# Altium PCB CC2530Controller.PcbDoc
Units mil, origin at the board's own origin, x right, y up, seen from the top; angles counter-clockwise.
Board outline 1627 x 1718 mil, 2 copper layers (Top Layer, Bottom Layer), stack 12.8 mil thick; 49 components, 32 nets, 192 pads, 185 vias.
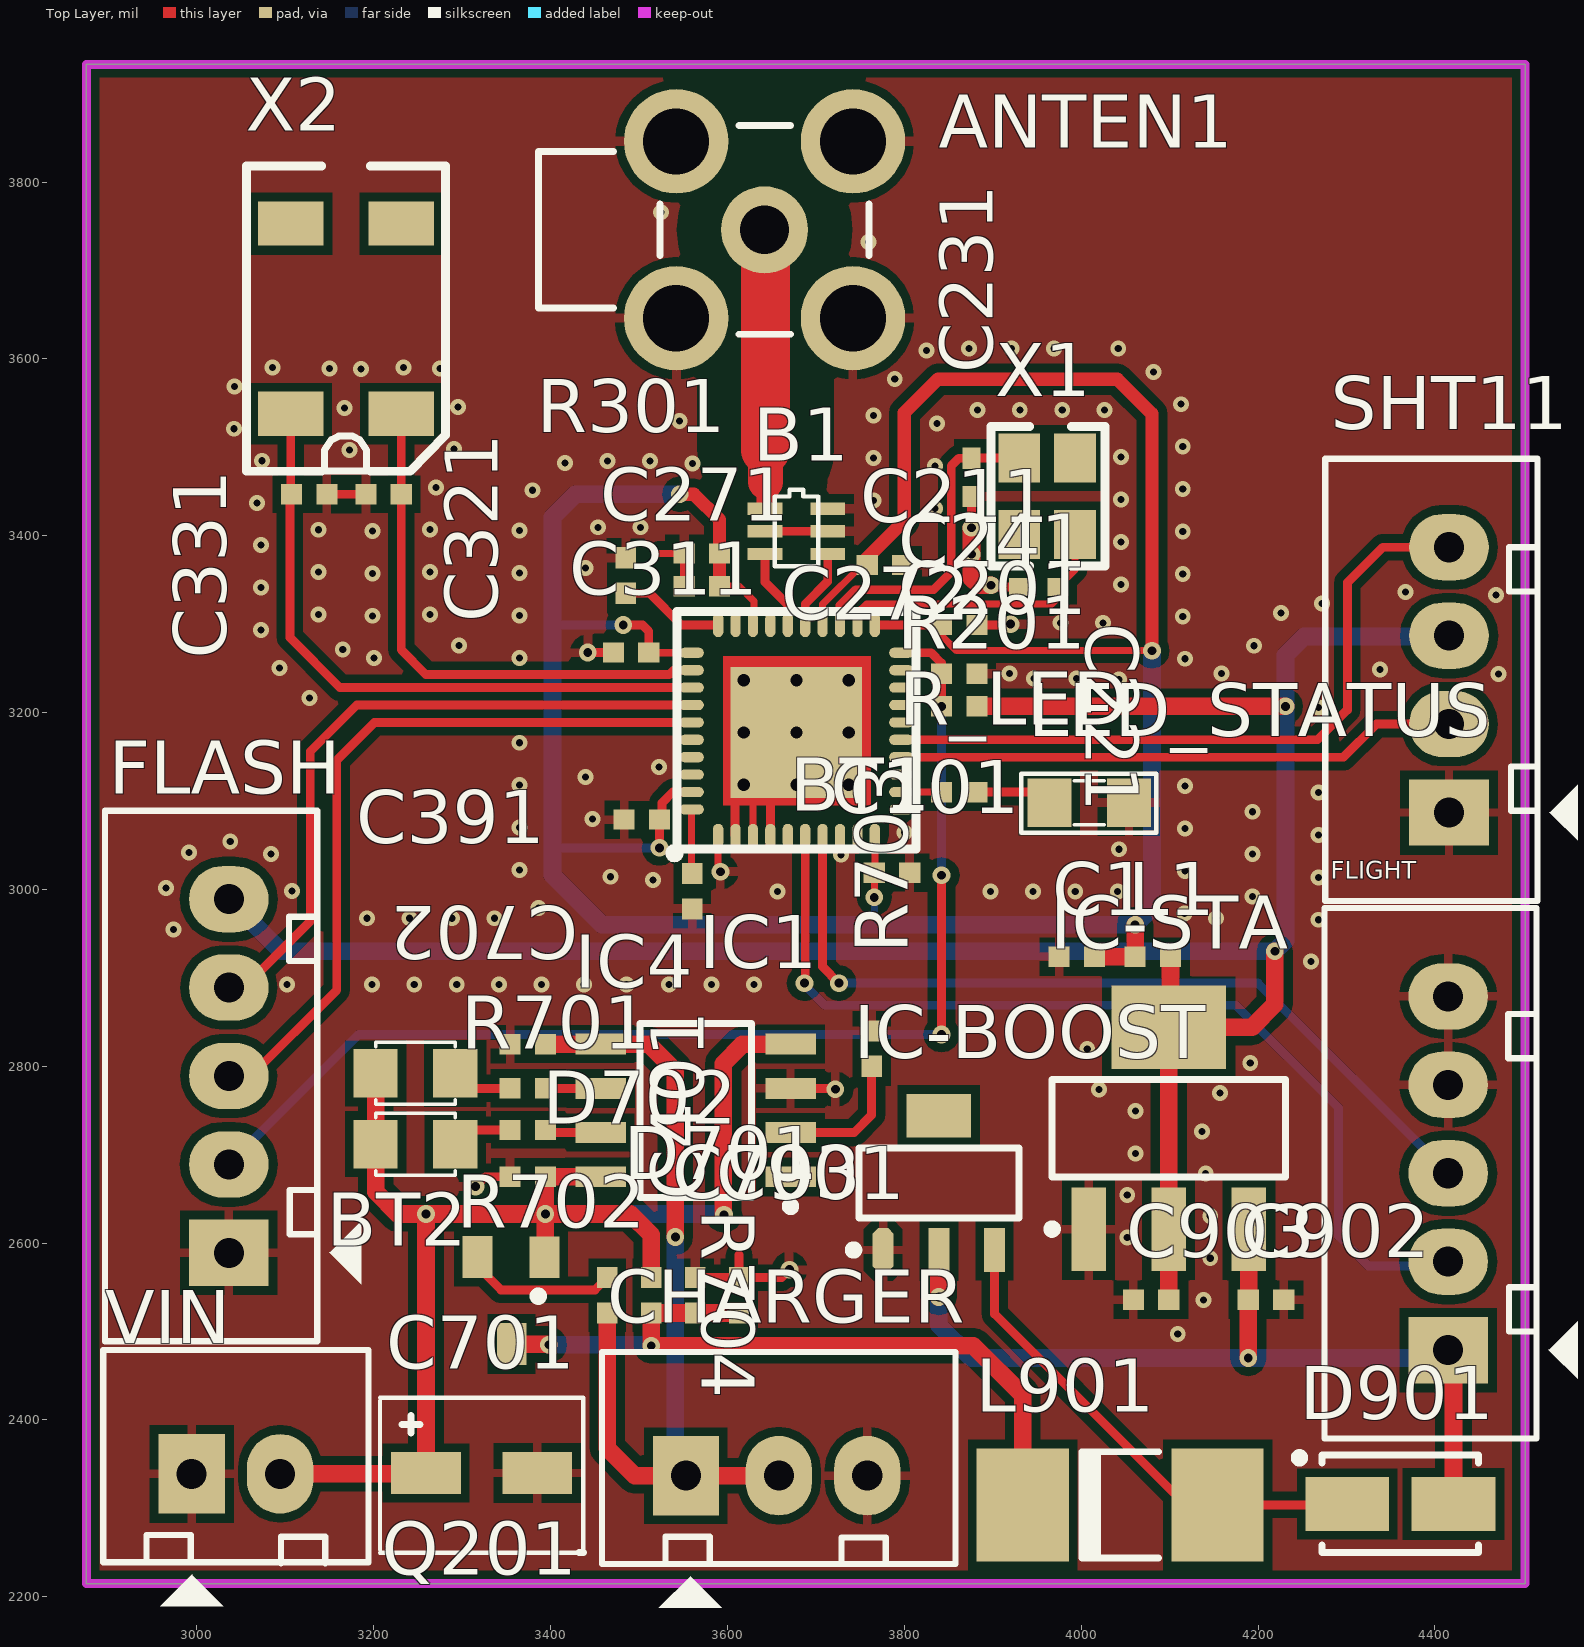
[diagram p0: Top Layer view]
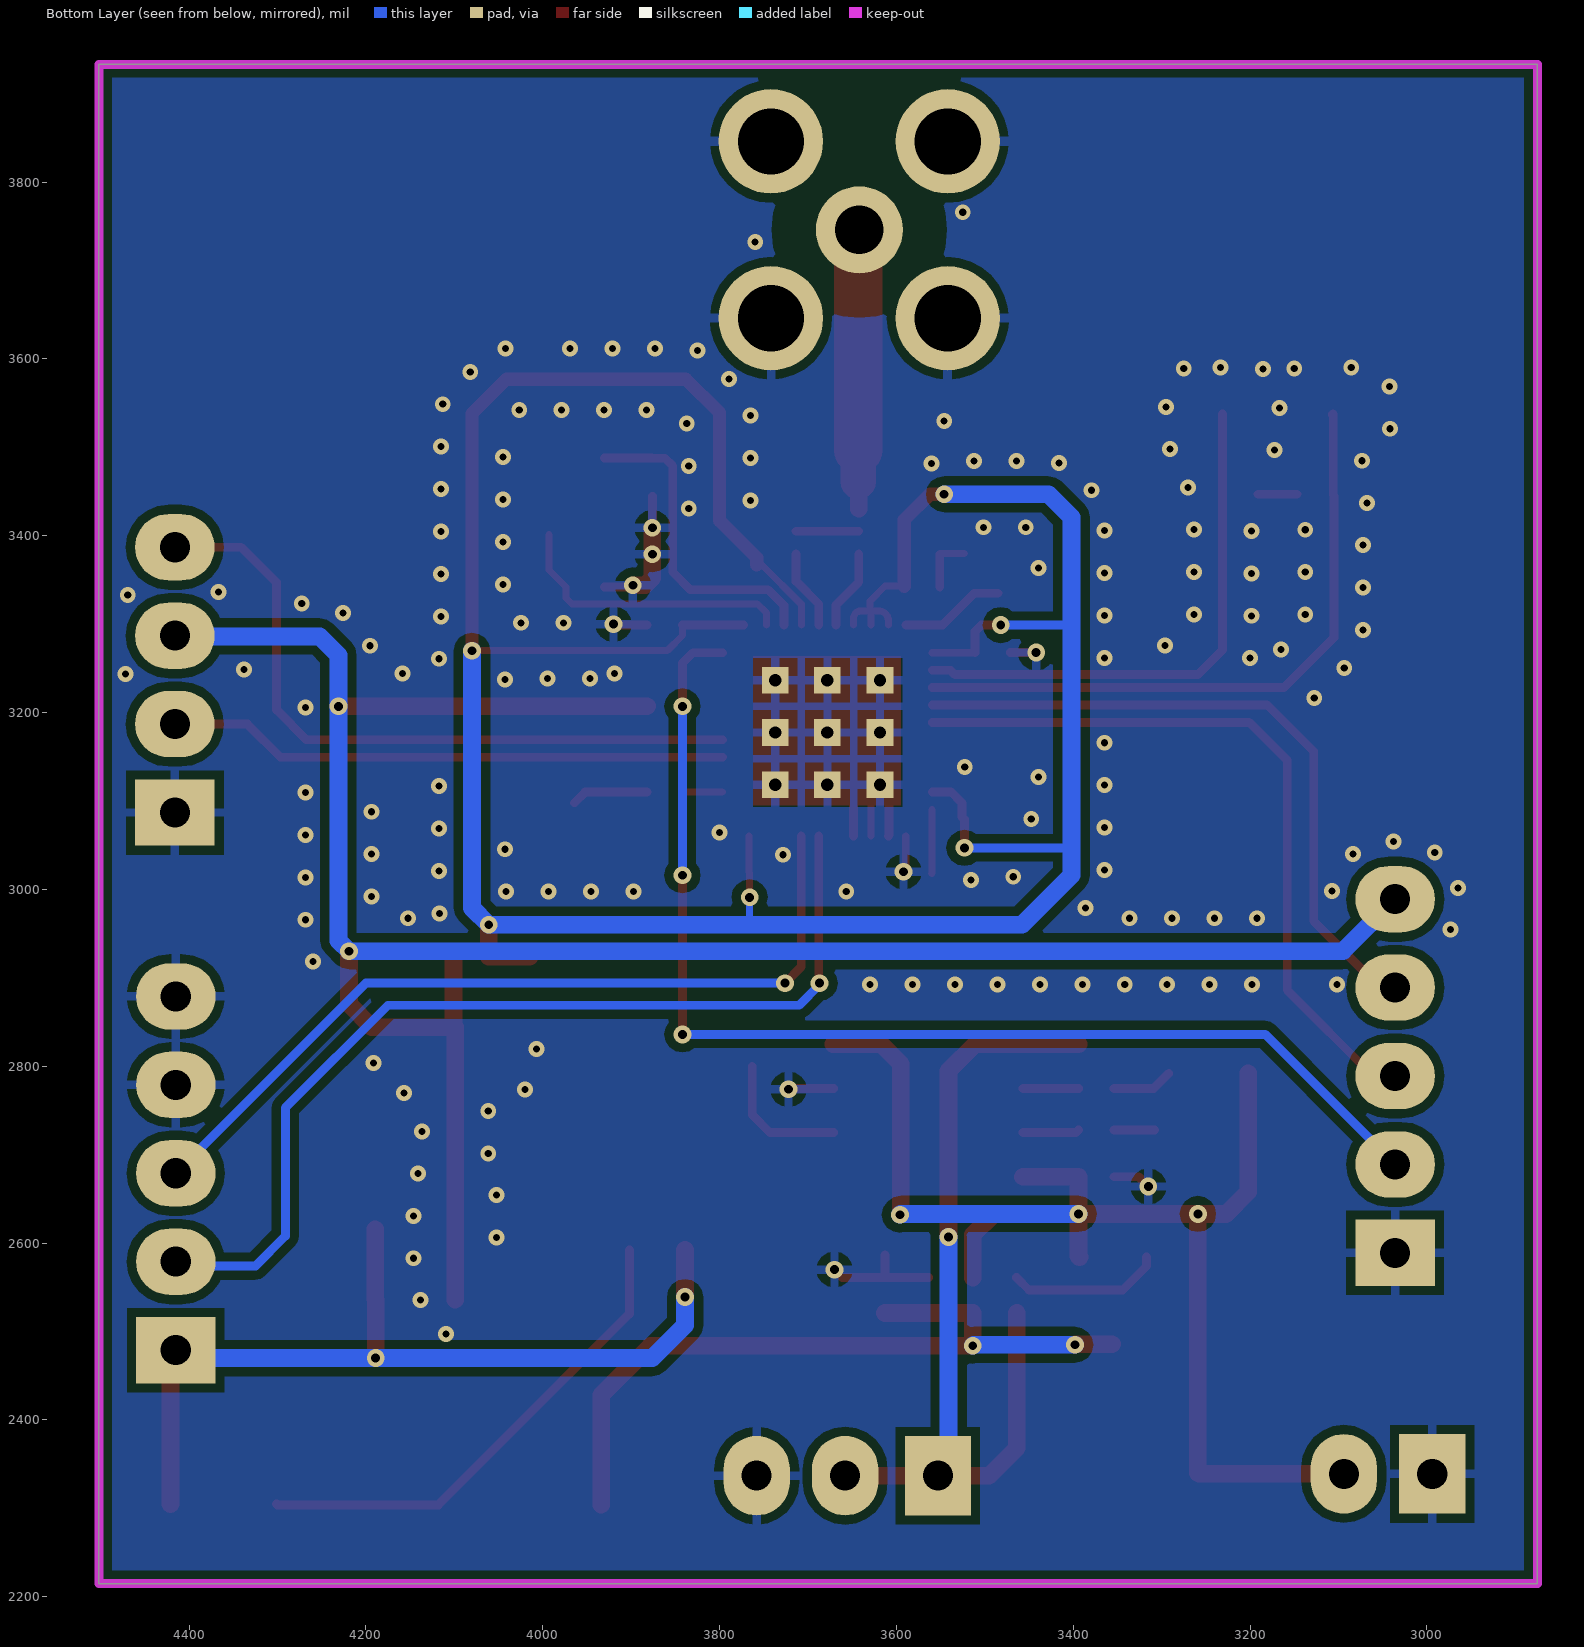
[diagram p1: Bottom Layer view, seen from below]

## Layer stack, top to bottom
Top Layer: signal copper 1.4
Dielectric 1: core 10, FR-4, Dk 4.2
Bottom Layer: signal copper 1.4

## Board outline
2875,2215 4502,2215 4502,3933 2875,3933

## Design rules (kind name [scope] priority, off if disabled: settings)
Clearance "Stitching GND" [IsStitchingVia and InNet('GND') vs (IsVia and (Not IsStitchingVia)) Or IsPad] p1: gap=5
Clearance "Stitching No Net" [IsStitchingVia and InNet('No Net') vs (IsVia and (Not IsStitchingVia)) Or IsPad] p2: gap=5
Clearance ANTEN_ [All vs InNet('ANTEN')] p3: gap=50
Clearance [All] p4: gap=10
DiffPairsRouting [All] p1: maxlimit=10 minlimit=8 mostfreqgap=8 toplayer_minwidth=10 toplayer_maxwidth=10 toplayer_prefwidth=8 bottomlayer_minwidth=10 bottomlayer_maxwidth=10 bottomlayer_prefwidth=8 maxuncoupledlength=500
PolygonConnect [All] p1: connectstyle=Relief reliefconductorwidth=10 reliefentries=4 polygonreliefangle="90 Angle" airgapwidth=10
RoomDefinition CC2530Controller [InComponentClass('CC2530Controller')] p1: confinementstyle=ConfineIn formatcopy=TRUE lockcomponents=FALSE outline 0,0 2000,0 2000,1000 0,1000
RoutingVias [All] p1: holewidth=10 width=20 viastyle="Through Hole" minholewidth=10 minwidth=20 maxholewidth=10 maxwidth=20
SolderMaskExpansion [All] p1: expansion=4
Width VDD_5V [InNet('VDD_5V')] p1: maxlimit=25 minlimit=15 preferedwidth=20
Width BAT [InNet('V_BAT')] p2: maxlimit=20 minlimit=15 preferedwidth=20
Width VCC_SOON [InNet('VCC_SOON')] p3: maxlimit=25 minlimit=15 preferedwidth=20
Width VDD_SEMI [InNet('VDD_SEMI')] p4: maxlimit=20 minlimit=15 preferedwidth=20
Width VDD_3.3V [InNet('VDD_3.3V')] p5: maxlimit=20 minlimit=15 preferedwidth=20
Width ANTEN [InNet('ANTEN')] p6: maxlimit=55 minlimit=20 preferedwidth=40
Width VDD_CC2530 [InNet('VDD_CC2530')] p7: maxlimit=20 minlimit=8 preferedwidth=15
Width [All] p8: maxlimit=10 minlimit=8 preferedwidth=8
29 further rules are at their usual default settings.

## Classes and differential pairs
differential pair DIFF1: +P -N

## Components (designator, comment, footprint, x,y, rotation, side; value= is the part's Value field where it differs from the comment)
ANTEN1 "ANTENNA" ANTEN.08-H5 3386,3746 r0 top
B1 "2450BM15A0002" 2450BM_2450BM15A0002(Primary) 3678,3405 r90 top
BT1 "LED" LED0805-Blue 3202,2792 r0 top
BT2 "LED" LED0805-Blue 3202,2712 r0 top
C1 "103" "0402 (REFLOW LF)" 3995,2924 r0 top
C101 "103" "0402 (REFLOW LF)" 3786,3019 r180 top
C201 "104" "0402 (REFLOW LF)" 3862,3244 r180 top
C211 "103" "0402 (REFLOW LF)" 3778,3367 r180 top
C221 "103" "0402 (REFLOW)" 3952,3342 r0 top
C231 "103" "0402 (REFLOW)" 3876,3466 r90 top
C241 "103" "0402 (REFLOW LF)" 3862,3299 r180 top
C271 "103" "0402 (REFLOW LF)" 3571,3380 r0 top
C272 "103" "0402 (REFLOW LF)" 3571,3343 r0 top
C311 "103" "0402 (REFLOW LF)" 3491,3268 r0 top
C321 "103" "0402 (REFLOW LF)" 3211,3447 r0 top
C331 "103" "0402 (REFLOW LF)" 3127,3447 r180 top
C391 "103" "0402 (REFLOW LF)" 3503,3079 r0 top
C401 "103" "0402 (REFLOW LF)" 3560,2998 r90 top
C701 "10uF/16V" CAP-B-22UF/16V 3322,2340 r0 top
C702 "103" "0402 (REFLOW LF)" 3374,2825 r0 top
C703 "103" "0402 (REFLOW LF)" 3563.33,2541 r270 top
C901 "103" "0402 (REFLOW LF)" 3613,2541 r90 top
C902 "103" "0402 (REFLOW LF)" 4209,2536 r0 top
C903 "103" "0402 (REFLOW LF)" 4079,2536 r180 top
CHARGER "JP3" CON3 3558,2337 r0 top
D701 "3V3" "0402 (REFLOW LF)" 3513.67,2541 r270 top
D702 "3V3" "0402 (REFLOW LF)" 3464,2541 r90 top
D901 "3V3" SS1X-SMD 4361,2305 r0 top
FLASH "JP5" CON5 3036,2589 r90 top
FLIGHT "JP5" CON5 4415,2479 r90 top
IC1 "CC2530EM" "QLP40 (Reflow)" 3678,3179 r90 top
IC4 "TP4056-1A" TP4056-1A 3564,2750 r180 top
IC-BOOST "CE8301" SOT89 3839,2668 r90 top
IC-STA "LM1117" SOT223-4N 4099,2730.01 r90 top
L1 "150mH" "0402 (REFLOW LF)" 4081,2924 r0 top
L901 "150mH" LXX 4044,2304 r0 top
LED_STATUS "LED" SM-0805 4009,3098 r0 top
Q201 "IRF9540" SOT23A 3356,2535 r180 top
R201 "1k" "0402 (REFLOW LF)" 3862,3207 r0 top
R301 "1k" "0402 (REFLOW LF)" 3485,3355 r270 top
R701 "330" "0402 (REFLOW LF)" 3374,2775 r180 top
R702 "330" "0402 (REFLOW LF)" 3374,2728 r180 top
R703 "1k" "0402 (REFLOW LF)" 3763,2820 r270 top
R704 "10K" "0402 (REFLOW LF)" 3374,2675 r0 top
R_LED "330" "0402 (REFLOW LF)" 3862,3110 r180 top
SHT11 "JP4" CON4 4416,3087 r90 top
VIN "JP2" CON2 2994,2339 r0 top
X1 "32M" "XTAL_SMD_3_2x2_5 (3.2 x 2.5 mm)" 3930,3488 r270 top
X2 "32Khz" "XTAL_SMD_85SMX (8.7x3.8mm)" 3166,3643 r90 top

## Footprints (in the part's own frame and the unit in brackets; to place one, negate y for a bottom-side part, rotate by r counter-clockwise, add the part's x,y. Pads: shape width x height; smd on the part's side, far side on the other; paste and mask are expansions set on the pad)
"0402 (REFLOW LF)" [mil]
  rect 24x23 smd paste+0 mask+6: 1(-20,0) 2(20,0)
"0402 (REFLOW)" [mil]
  rect 24x20 smd paste+0 mask+4: 1(-21.65,0) 2(21.65,0)
2450BM_2450BM15A0002(Primary) [mm]
  rect 0.35x1 smd paste-25.4 mask-25.4: 1(0.65,0.9) "2 5 6"(0,0.9) "2 5 6"(0,-0.9) "2 5 6"(0.65,-0.9) 3(-0.65,0.9) 4(-0.65,-0.9)
  silkscreen extent -1,-0.63 1.2,0.63
ANTEN.08-H5 [mm] "Chan anten"
  round 2.5 hole 1.4: 1(6.5,0)
  round 3 hole 1.9: 2(3.96,-2.54) 2(3.96,2.54) 2(9.04,-2.54) 2(9.04,2.54)
  silkscreen extent 0,-3 9.5,3
CAP-B-22UF/16V [mm]
  rect 2x1.2 smd: 1(-1.6,0) 2(1.6,0)
  silkscreen extent -2.92,-2.29 2.92,2.16
CON2 [mil] "CON2"
  rect 75x90 hole 34: 1(0,0)
  oval 75x90 hole 34: 2(100,0)
  silkscreen extent -100,-150 200,140, body extent -68,-70 168,107, height 236
CON3 [mil] "CON 3"
  rect 75x90 hole 34: 1(-5,0)
  oval 75x90 hole 34: 2(100,0) 3(200,0)
  silkscreen extent -100,-150 300,140, body extent -95,-90 295,136, height 276
CON4 [mil] "CON4"
  rect 75x90 hole 34: 1(0,0)
  oval 75x90 hole 34: 2(100,0) 3(200,0) 4(300,0)
  silkscreen extent -100,-150 400,140, body extent -90,-90 398,136, height 276
CON5 [mil] "CON5"
  rect 75x90 hole 34: 1(0,0)
  oval 75x90 hole 34: 2(100,0) 3(200,0) 4(300,0) 5(400,0)
  silkscreen extent -100,-150 500,140
LED0805-Blue [mil]
  rect 50x55 smd: 1(0,0) 2(90,0)
  silkscreen extent 0,-35 90,35, body extent 5,-25 85,25, height 43
LXX [mm] "MELF Diode, 2-Leads, Body 7.30x3.00mm, IPC Medium Density"
  rect 2.65x3.25 smd: 1(-2.8,0) 2(2.8,0)
  silkscreen extent -1.1,-1.52 1.1,1.53, body extent -3.65,-1.5 3.65,1.5, height 3
"QLP40 (Reflow)" [mm] "CC2530 QFN, 40-Leads, Body 6.00x6.00mm, Pitch 0.50mm, Thermal Pad 4.74x4.74mm, IPC Medium Density"
  oval 0.695x0.295 smd paste-0.045 mask+0.055: 1(-3.008,2.25) 2(-3.008,1.75) 3(-3.008,1.25) 4(-3.008,0.75) 5(-3.008,0.25) 6(-3.008,-0.25) 7(-3.008,-0.75) 8(-3.008,-1.25) 9(-3.008,-1.75) 10(-3.008,-2.25) 21(3.048,-2.25) 22(3.048,-1.75) 23(3.048,-1.25) 24(3.048,-0.75) 25(3.048,-0.25) 26(3.048,0.25) 27(3.048,0.75) 28(3.048,1.25) 29(3.048,1.75) 30(3.048,2.25)
  oval 0.295x0.695 smd paste-0.045 mask+0.055: 11(-2.248,-3.01) 12(-1.748,-3.01) 13(-1.248,-3.01) 14(-0.748,-3.01) 15(-0.248,-3.01) 16(0.252,-3.01) 17(0.752,-3.01) 18(1.252,-3.01) 19(1.752,-3.01) 20(2.252,-3.01) 31(2.252,3.01) 32(1.752,3.01) 33(1.252,3.01) 34(0.752,3.01) 35(0.252,3.01) 36(-0.248,3.01) 37(-0.748,3.01) 38(-1.248,3.01) 39(-1.748,3.01) 40(-2.248,3.01)
  rect 0.762x0.762 / inner round 0 / far side rect 0.762x0.762 hole 0.356 paste+0 mask+0: 41(-1.538,1.51) 47(-1.538,0) 51(1.462,0) 57(-1.538,-1.5) 59(-0.038,-1.5) 61(1.462,-1.5) 63(-0.038,1.51) 65(1.462,1.51)
  rect 0.762x0.762 smd mask+0: 42(-1.538,0.75) 43(-0.788,0.75) 44(-0.038,0.75) 45(0.712,0.75) 46(1.462,0.75) 48(-0.788,0) 50(0.712,0) 52(-1.538,-0.75) 53(-0.788,-0.75) 54(-0.038,-0.75) 55(0.712,-0.75) 56(1.462,-0.75) 58(-0.788,-1.5) 60(0.712,-1.5) 62(-0.788,1.51) 64(0.712,1.51)
  rect 0.762x0.762 / inner round 0 / far side rect 0.762x0.762 hole 0.356 mask+0: 49(-0.038,0)
  Top Layer region: -1.915,1.855 1.93,1.855 1.93,-1.93 -1.915,-1.93
  Top Layer region: -1.873,1.855 1.93,1.855 1.93,-1.879 -1.873,-1.879
  Top Layer region: -1.94,1.855 1.956,1.855 1.956,-1.955 -1.94,-1.955
  Top Layer region: -1.942,1.855 1.905,1.855 1.905,-1.955 -1.942,-1.955
  Top Layer region: -2.108,1.855 1.981,1.855 1.981,-1.904 -2.108,-1.904
  Top Layer region: -1.922,1.855 1.981,1.855 1.981,-1.93 -1.922,-1.93
  Top Layer region: -1.981,1.855 1.905,1.855 1.905,-1.985 -1.981,-1.985
  Top Layer region: -1.956,1.855 1.93,1.855 1.93,-1.955 -1.956,-1.955
  Top Layer region: -2.134,2.109 2.159,2.109 2.159,-2.133 -2.134,-2.133
  Top Layer region: -1.93,1.855 1.956,1.855 1.956,-1.955 -1.93,-1.955
  Top Layer region: -1.905,1.855 2.108,1.855 2.1,-0.087 2.108,-2.031 -1.905,-2.031
  Top Layer region: -1.847,1.855 1.93,1.855 1.93,-1.853 -1.847,-1.853
  Top Layer region: -1.905,1.855 1.956,1.855 1.956,-1.937 -1.905,-1.937
  Top Layer region: -1.852,1.855 1.854,1.855 1.854,-1.853 -1.852,-1.853
  Top Layer region: -1.854,1.855 1.803,1.855 1.803,-1.853 -1.854,-1.853
  Top Layer region: -1.942,1.855 1.93,1.855 1.93,-1.955 -1.942,-1.955
  Top Layer region: -1.88,1.855 1.93,1.855 1.93,-1.886 -1.88,-1.886
  Top Layer region: -1.981,1.855 1.956,1.855 1.956,-1.986 -1.981,-1.986
  Top Layer region: -2.007,1.855 1.905,1.855 1.897,-0.076 1.905,-2.01 -2.007,-2.01
  Top Layer region: -1.924,1.855 1.93,1.855 1.93,-1.93 -1.924,-1.93
  Top Layer region: -1.926,1.855 1.905,1.855 1.905,-1.93 -1.926,-1.93
  Top Layer region: -2.001,1.855 1.981,1.855 1.981,-2.006 -2.001,-2.006
  Top Layer region: -1.848,1.855 1.905,1.855 1.905,-1.853 -1.848,-1.853
  Top Layer region: -2.098,2.084 2.159,2.084 2.159,-2.11 -2.098,-2.11
  silkscreen extent -3.76,-3.43 3.44,3.76
SM-0805 [mil] "Compoment SMD 80x50mil"
  rect 50x55 smd: 1(-45,0) 2(45,0)
  silkscreen extent -77,-34 76,33, body extent -40,-27 40,23, height 24
SOT23A [mm] "SOT 23A"
  rect 0.85x1.2 smd: 1(-0.94,-1.245) 2(0.005,1.25) 3(0.985,-1.25)
  silkscreen extent -0.89,-0.25 -0.64,0, body extent -1.5,-1.3 1.5,1.2, height 1.06
SOT89 [mm] "SOT 89, 4-Leads, Body 4.50x4.27mm (avg), Pitch 1.60mm, IPC Medium Density"
  oct 1.25x0.6 smd: 1(-1.925,1.6)
  rect 1.25x0.6 smd: 2(-1.925,0) 3(-1.925,-1.6)
  rect 1.25x1.85 smd: 4(1.925,0)
  silkscreen extent -2.05,-2.3 1,2.57, body extent -1.3,-2.3 1.3,2.3, height 1.6
SOT223-4N [mm] "SOT223, 4-Leads, Body 6.5x3.5mm, Pitch 2.3mm, Lead Span 7mm, IPC Medium Density"
  rect 2.4x1 smd: 1(-2.9,2.3) 2(-2.9,0) 3(-2.9,-2.3)
  rect 2.4x3.3 smd: 4(2.9,0)
  silkscreen extent -3.02,-3.35 1.4,3.47, body extent -3.39,-3.27 3.5,3.23, height 1.72
SS1X-SMD [mm] "Molded Diode, 2-Leads, Body 4.25x2.67mm, IPC Medium Density"
  rect 2.4x1.55 smd: 1(-1.525,0) 2(1.525,0)
  silkscreen extent -3.02,-1.4 2.25,1.45, body extent -2.25,-1.4 2.25,1.39, height 2.29
TP4056-1A [mm] "TP4056-1A, 8-Leads, Body 4.90x3.90mm, Pitch 1.27mm, IPC Medium Density"
  rect 1.45x0.6 smd: 1(-2.725,1.905) 2(-2.725,0.635) 3(-2.725,-0.635) 4(-2.725,-1.905) 5(2.725,-1.905) 6(2.725,-0.635) 7(2.725,0.635) 8(2.725,1.905)
  silkscreen extent -2.85,-2.5 1.6,2.88, body extent -2,-2.5 2,2.5, height 1.75
"XTAL_SMD_3_2x2_5 (3.2 x 2.5 mm)" [mil]
  rect 55x47 smd paste-2 mask+2: 1(0,0) 2(86.61,0) 3(86.61,62.99) 4(0,62.99)
  silkscreen extent -35,-32 122,97
"XTAL_SMD_85SMX (8.7x3.8mm)" [mil]
  rect 50x74 smd paste+0 mask+4: 1(-105,-65) 2(110,-65) 3(110,60) 4(-105,60)
  silkscreen extent -170,-115 175,110

## Part data
B1: library part 2450BM15A0002_1
BT1 BT2 LED_STATUS: "LED Single colour Green and Red"
C1 C101 C201 C211 C221 C231 C241 C271 C272 C311 C321 C331 C391 C401 C702 C703 C901 C902 C903: library part CM, "Cap SMD"
C701: library part CP3, "Cap 100uF/35V - 470uF/16V"
CHARGER: library part Con3, "Connector 3"
D701 D702 D901: library part DZ, "Diode Zenner"
FLASH FLIGHT: library part Con5, "Connector 5"
IC-BOOST: "CE8301-SOT-89-3"
IC-STA: "3v3"
L1 L901: library part L1, "Inductor"
Q201: "HEXFET P-Channel Power MOSFET"
R201 R301 R701 R702 R703 R704 R_LED: library part R, "Resistor 1/4W"
SHT11: library part Con4, "Connector 4"
VIN: library part Con2, "Connector 2"
X1: library part XT2_SMD_32M, "Crystal For all Crystal 2pin."
X2: library part XT2_SMD_32KHz, "Crystal For all Crystal 2pin."

## Via types
v1: diameter 18, hole 8, Top Layer to Bottom Layer, 155 vias
v2: diameter 20, hole 10, Top Layer to Bottom Layer, 30 vias

## Nets (pads, with @x,y where several pads share a name; then routed paths per layer and width w, separated by ;. In a path a pad name is that pad's centre, name@x,y a point inside that pad or via, vN(x,y) a via of type N, cw(c..) or ccw(c..) an arc to the next point about the centre after c; other vN are vias at no path point)
ANTEN: ANTEN1.1 B1.1 | length 316
  Top Layer w20: B1.1 3642.57,3460.57 3643,3461
  Top Layer w40: 3643,3461 3643,3497
  Top Layer w55: ANTEN1.1 3643,3744.91 3643,3497
DC: FLASH.4 IC1.34 | length 768.4
  Top Layer w10: FLASH.4 3053,2889 3128,2964 3128,3156 3180.6,3208.6 IC1.34
DD: FLASH.3 IC1.35 | length 841.5
  Top Layer w10: FLASH.3 3061,2789 3158,2886 3158,3146 3200.91,3188.91 IC1.35
GND: "B1.2 5 6" ANTEN1.2 C1.1 C101.1 C201.1 C211.1 C221.1 C231.1 C241.1 C271.1 C272.1 C311.1 C321.1 C331.1 C391.1 C401.1 C701.2 C702.1 C703.1 C901.2 C902.2 C903.2 CHARGER.3 FLASH.1 FLIGHT.4 FLIGHT.5 IC1.1 IC1.2 IC1.3 IC1.4 IC1.41 IC1.47 IC1.49 IC1.51 IC1.57 IC1.59 IC1.61 IC1.63 IC1.65 IC4.3 IC-BOOST.1 IC-STA.1 LED_STATUS.2 R301.1 R703.1 R704.1 SHT11.1 VIN.1 | length 854.8
  Top Layer w8: 3523,3380 C271.1 ; IC1.1 3589.42,3022.58 v2(3592,3020) ; IC1.41 3628.79,3108.2 IC1.3
  Top Layer w10: C331.1 C321.1 ; v2(3315,2664) 3326,2675 R704.1 ; v2(3442,3268) C311.1 ; C272.1@3551,3342 C272.1 C271.1@3551,3379 ; C703.1 C901.2 ; IC1.41@3608.47,3107.97 3608.47,3061.2 IC1.2 ; 3613,2586.49 C901.2 ; 3642.57,3405 3713.43,3405 ; IC1.4 3648.47,3104.47 IC1.47@3670.22,3126.22 ; v2(3670,2570) 3661,2561 C901.2 ; IC4.3 3721,2775 v2(3722,2774) ; v2(3876,3409) C231.1 ; C241.1 3919,3299 v2(3920,3300) ; v2(3898,3344) 3900,3342 C221.1
  Top Layer w20: v2(3876,3409) v2(3876,3379) 3876,3352 3884,3344 v2(3898,3344)
  other v1: 4109.18,2497.27 4138.23,2535.47 4145.92,2582.86 4052.08,2606.36 4145.92,2630.86 4052.08,2654.36 4140.82,2678.58 4061.57,2701.41 4136.43,2726.38 4061.57,2749.41 4157.1,2769.7 4020.11,2773.59 4191.19,2803.49 4006.81,2819.71 3101.74,2892.57 3197.74,2892.57 3245.74,2892.57 3293.74,2892.57 3341.74,2892.57 3389.74,2892.57 3437.74,2892.57 3485.74,2892.57 3533.74,2892.57 3581.74,2892.57 3629.74,2892.57 4259.8,2918.46 2973.53,2954.57 4268.43,2965.68 3192.25,2967.43 3240.25,2967.43 3288.25,2967.43 3336.25,2967.43 4152.25,2967.43 4116.74,2972.87 3386.08,2978.99 4193.57,2991.85 3656.74,2997.43 3897.3,2997.43 3945.3,2997.43 3993.3,2997.43 4041.3,2997.43 3107.56,2998.38 2964.89,3001.79 3515.67,3010.5 3467.82,3014.36 4268.43,3013.68 4117.43,3020.87 3364.57,3021.9 3728.38,3039.2 3083.49,3039.91 4193.57,3039.85 2991.18,3041.95 4042.57,3045.41 3037.62,3054.06 4268.43,3061.68 3800.1,3064.19 4117.43,3068.87 3364.57,3069.9 3447.47,3079.64 4193.57,3087.85 4268.43,3109.68 4117.43,3116.87 3364.57,3117.9 3439.43,3126.97 3522.69,3138.45 3364.57,3165.9 4268.43,3205.68 3127.46,3216.37 4042.57,3237.41 3946.58,3238.44 3994.58,3238.44 3918.78,3244.43 4158.78,3244.43 4471.83,3243.66 4337.72,3248.7 3093.52,3250.32 4117.43,3260.87 3200.18,3261.51 3364.57,3261.9 3164.88,3271.28 3296.18,3275.64 4195.33,3275.55 3072.36,3293.4 3976.49,3301.56 4024.49,3301.56 3198.36,3309.48 4114.88,3308.8 3364.57,3309.9 3137.64,3310.8 3263.64,3310.94 4225.76,3312.67 4272.51,3323.56 4469.35,3332.82 4366.72,3336.54 3072.36,3341.4 4045.12,3344.9 3198.36,3357.48 4114.88,3356.8 3364.57,3357.9 3137.64,3358.8 3263.64,3358.94 3439.43,3363.74 3072.36,3389.4 4045.12,3392.9 3198.36,3405.48 4114.88,3404.8 3364.57,3405.9 3137.64,3406.8 3263.64,3406.94 3453.69,3409.57 3501.69,3409.57 3834.88,3430.8 3067.77,3437.18 3765.12,3439.96 4045.12,3440.9 3379.56,3451.5 4114.88,3452.8 3270.23,3454.48 3834.88,3478.8 3416.29,3482.4 3560.18,3481.88 3464.25,3484.43 3512.25,3484.43 3073.36,3484.85 3765.12,3487.96 4045.12,3488.9 3172.32,3496.91 3290.51,3497.99 4114.88,3500.8 3041.77,3520.99 3837.08,3526.75 3545.93,3529.98 3765.12,3535.96 3882.55,3542.12 3930.55,3542.12 3978.55,3542.12 4026.55,3542.12 3166.77,3544.58 3295.23,3545.76 4113.03,3548.76 3042.56,3568.99 3789.17,3577.5 4081.97,3585.36 3150.05,3589.31 3185.59,3588.74 3275.05,3589.31 3085.6,3590.23 3233.56,3590.23 3825.15,3609.28 3873.08,3611.88 3921.08,3611.88 3969.08,3611.88 4041.89,3611.76 3759.68,3732.37 3524.95,3765.84
LED: IC1.12 R_LED.2 | length 45.6
  Top Layer w8: IC1.12 3841.83,3110.17 R_LED.2
N: B1.4 IC1.25 | length 91
  Top Layer w10: IC1.25 3687.84,3322.84 3713.43,3348.43 B1.4
NetBT1_2: BT1.2 R701.2 | length 69
  Top Layer w10: BT1.2 3309,2775 R701.2
NetBT2_2: BT2.2 R702.2 | length 46
  Top Layer w10: BT2.2@3308,2728 R702.2
NetC221_2: C221.2 IC1.22 X1.3 | length 327.3
  Top Layer w8: IC1.22 3746.9,3312.9 3757,3323 3967,3323 3973.65,3329.65 C221.2 3992.99,3361.34 X1.3
NetC401_2: C401.2 IC1.40 | length 72.7
  Top Layer w8: IC1.40 3559.5,3018.5 C401.2
NetD702_2: D702.2 Q201.3 | length 174.1
  Top Layer w10: Q201.3 3317.2,2573.8 3344,2547 3450,2547 D702.2
NetD901_1: D901.1 IC-BOOST.3 L901.2 | length 561.1
  Top Layer w10: IC-BOOST.3 3901.99,2520.01 4118,2304 L901.2 4299.96,2304 D901.1
NetIC1_30: IC1.30 R301.2 | length 119.3
  Top Layer w10: R301.2 3512,3335 3548,3299 IC1.30
NetIC4_2: IC4.2 R703.2 | length 155
  Top Layer w10: IC4.2 3743,2725 3763,2745 R703.2
NetIC4_6: IC4.6 R701.1 | length 62.7
  Top Layer w10: R701.1 IC4.6
NetIC4_7: IC4.7 R702.1 | length 64
  Top Layer w10: R702.1 3397,2725 IC4.7
NetLED_STATUS_1: LED_STATUS.1 R_LED.1 | length 87
  Top Layer w10: R_LED.1 3952,3110 LED_STATUS.1
P: B1.3 IC1.26 | length 91
  Top Layer w10: B1.3 3642.57,3347.43 3668.16,3321.84 IC1.26
RESET: C201.2 FLASH.2 IC1.20 R201.1 | length 1338.6
  Top Layer w10: IC1.20 3830.35,3267.65 3842,3256 C201.2 v2(3842,3207) ; v2@3841,2835 v2(3842,2836) v2(3842,3016)
  Bottom Layer w10: FLASH.2 3183,2836 v2(3842,2836) ; v2(3842,3016) v2(3842,3207)
SCL_1: FLIGHT.3 IC1.7 | length 952.3
  Top Layer w10: IC1.7 3707.53,2912.47 v2(3726,2894)
  Bottom Layer w10: v2(3726,2894) 4200,2894 FLIGHT.3
SCL_2: IC1.14 SHT11.2 | length 635
  Top Layer w10: IC1.14 4296.54,3149.54 4334,3187 SHT11.2
SDA_1: FLIGHT.2 IC1.6 | length 1122.5
  Top Layer w8: v2@3687,2888 v2@3687.84,2888.84 ; v2@3687.84,2888 v2@3687.84,2888.84 ; v2@3687.84,2894 v2@3687.84,2888.84
  Top Layer w10: v2@3687.84,2894 IC1.6
  Bottom Layer w10: v2(3687,2894) 3687,2892 3710,2869 4175,2869 4291,2753 4291,2608 4325,2574 4410,2574 FLIGHT.2
SDA_2: IC1.15 SHT11.4 | length 794.1
  Top Layer w10: IC1.15 4267.23,3169.23 4301,3203 4301,3347 4341,3387 SHT11.4
V_BAT: C702.2 CHARGER.1 CHARGER.2 D702.1 IC4.5 | length 982.2
  Top Layer w20: C702.2 IC4.5 3511,2825 3541,2795 v2(3541,2607) ; D702.1 3464,2368 3495,2337 CHARGER.1 CHARGER.2
  Bottom Layer w20: v2(3541,2607) 3541,2349 CHARGER.1
VCC_SOON: BT1.1 BT2.1 C701.1 D701.1 IC4.4 IC4.8 Q201.1 R704.2 VIN.2 | length 1584.5
  Top Layer w20: VIN.2 3258.01,2339 C701.1 v2(3259,2633) ; BT1.1 BT2.1 3202,2658 3227,2633 v2(3259,2633) ; Q201.1 3394,2585 v2(3394,2633) ; IC4.8 R704.2 v2(3394,2633) ; D701.1 3513.67,2609.33 3490,2633 v2(3394,2633) ; v2@3595,2633 3595,2803 3617,2825 IC4.4 ; v2(3259,2633) v2(3394,2633)
  Bottom Layer w20: v2(3394,2633) 3595,2633 v2(3596,2632)
VDD_3.3V: C903.1 FLASH.5 IC-STA.2 IC-STA.4 L1.2 R201.2 SHT11.3 | length 2670
  Top Layer w20: R201.2 v2(4231,3207) ; C903.1 IC-STA.2 IC-STA.4 ; L1.2 4101,2846.18 IC-STA.4 ; v2(4219,2930) 4219,2870 4193.18,2844.18 IC-STA.4
  Bottom Layer w20: FLASH.5 3095,2930 v2(4219,2930) 4231,2942 v2(4231,3207) 4231,3265 4252.13,3286.13 4415.13,3286.13 SHT11.3
VDD_5V: C902.1 D901.2 FLIGHT.1 IC-BOOST.2 IC-STA.3 | length 1002.8
  Top Layer w20: v2(3839,2539) IC-BOOST.2 ; v2(4189,2470) C902.1 4189.55,2536.55 IC-STA.3 ; FLIGHT.1 4421.04,2472.96 D901.2
  Bottom Layer w20: v2(3839,2539) 3839,2507 3876,2470 v2(4189,2470) 4406,2470 FLIGHT.1
VDD_CC2530: C1.2 C101.2 C211.2 C241.2 C271.2 C272.2 C311.2 C391.2 IC1.10 IC1.21 IC1.24 IC1.27 IC1.28 IC1.29 IC1.31 IC1.39 L1.1 | length 3595.1
  Top Layer w8: C311.2 3511.35,3267.65 IC1.31 ; C272.2 3613,3343 3630,3326 3630,3315 ; IC1.29 3609.1,3304.1 cw(c3620,3304.1) 3620,3315 ; 3621,3315 3630,3315 ; IC1.28 3628.79,3313.79 cw(c3630,3313.79) 3630,3315 ; IC1.27 3648.47,3306.53 ccw(c3640,3306.53) 3640,3315 3630,3315 ; IC1.24 3707.53,3322.53 3752,3367 C211.2 ; v2(3766,2991) C101.2 3766.58,3019.58 IC1.10 ; C241.2 3842,3287.22 3859.22,3270 v2(4080,3270)
  Top Layer w10: v2(3482,3299) 3504,3299 3511,3292 C311.2 ; v2(3523,3047) C391.2 3526,3082 3526,3098 3538.17,3110.17 IC1.39 ; 3772.71,3299 C241.2
  Top Layer w15: v2(3546,3447) 3562,3447 3591,3418 C271.2 C272.2 ; C211.2 3758,3375 3800,3417 3800,3539 3838,3577 4041,3577 4080,3538 v2(4080,3270)
  Top Layer w20: C1.2 L1.1 v2(4061,2960)
  Bottom Layer w8: 3766,2960 v2(3766,2991)
  Bottom Layer w10: 3402,3048 3403,3047 v2(3523,3047) ; 3402,3299 v2(3482,3299)
  Bottom Layer w20: v2(3546,3447) 3428,3447 3402,3421 3402,3299 3402,3048 3402,3016 3458,2960 3766,2960 v2(4061,2960) 4080,2979 v2(4080,3270)
VDD_SEMI: C703.2 C901.1 D701.2 L901.1 Q201.2 | length 862.4
  Top Layer w20: Q201.2 3397.21,2485.79 v2(3398,2485) ; C901.1 C703.2 D701.2 v2(3513.67,2484) 3878,2484 3933.76,2428.24 L901.1
  Bottom Layer w20: v2(3398,2485) 3512.67,2485 v2(3513.67,2484)
X1O1: C231.2 IC1.23 X1.1 | length 364.4
  Top Layer w10: IC1.23 3727.21,3321.21 3745,3339 3833,3339 3853,3359 3853,3479 3861.65,3487.65 C231.2 3876.35,3488 X1.1
X2O1: C331.2 IC1.33 X2.4 | length 732.8
  Top Layer w10: X2.4@3107,3537 X2.4 3106,3446 3105,3445 3105,3285 3161.72,3228.28 IC1.33
X2O2: C321.2 IC1.32 X2.1 | length 609.2
  Top Layer w10: X2.1 C321.2 3231,3271 3259,3243 3534,3243 3538.97,3247.97 IC1.32
pads on no net: IC1.5 IC1.8 IC1.9 IC1.11 IC1.13 IC1.16 IC1.17 IC1.18 IC1.19 IC1.36 IC1.37 IC1.38 IC1.42 IC1.43 IC1.44 IC1.45 IC1.46 IC1.48 IC1.50 IC1.52 IC1.53 IC1.54 IC1.55 IC1.56 IC1.58 IC1.60 IC1.62 IC1.64 IC4.1 IC-BOOST.4 X1.2 X1.4 X2.2 X2.3
copper on no net: | length 9
  Bottom Layer w10: 4407,3187 4416,3187

## Polygon pours and split planes (outlines as drawn)
GND on Top Layer "Top Layer-No Net" (solid, remove dead copper, pour order 16): 2875,3933 4502,3933 4502,2215 2875,2215
GND on Bottom Layer "Top Layer-No Net" (solid, remove dead copper, pour order 18): 2875,3933 4502,3933 4502,2215 2875,2215

## Keep-outs
Keep-Out Layer:
  the board outline again, w10